# Altium PCB PCB1.PcbDoc (part 2 of 2)
Units mm, origin at the board's own origin, x right, y up, seen from the top; angles counter-clockwise.
Board outline 130 x 100 mm, 6 copper layers (Top Layer, GND1, Signal_Power, Signal2, GND2, Bottom Layer), stack 0.963 mm thick; 332 components, 333 nets, 2042 pads, 102 vias.
Unrouted connection lines stored in the file: 903.
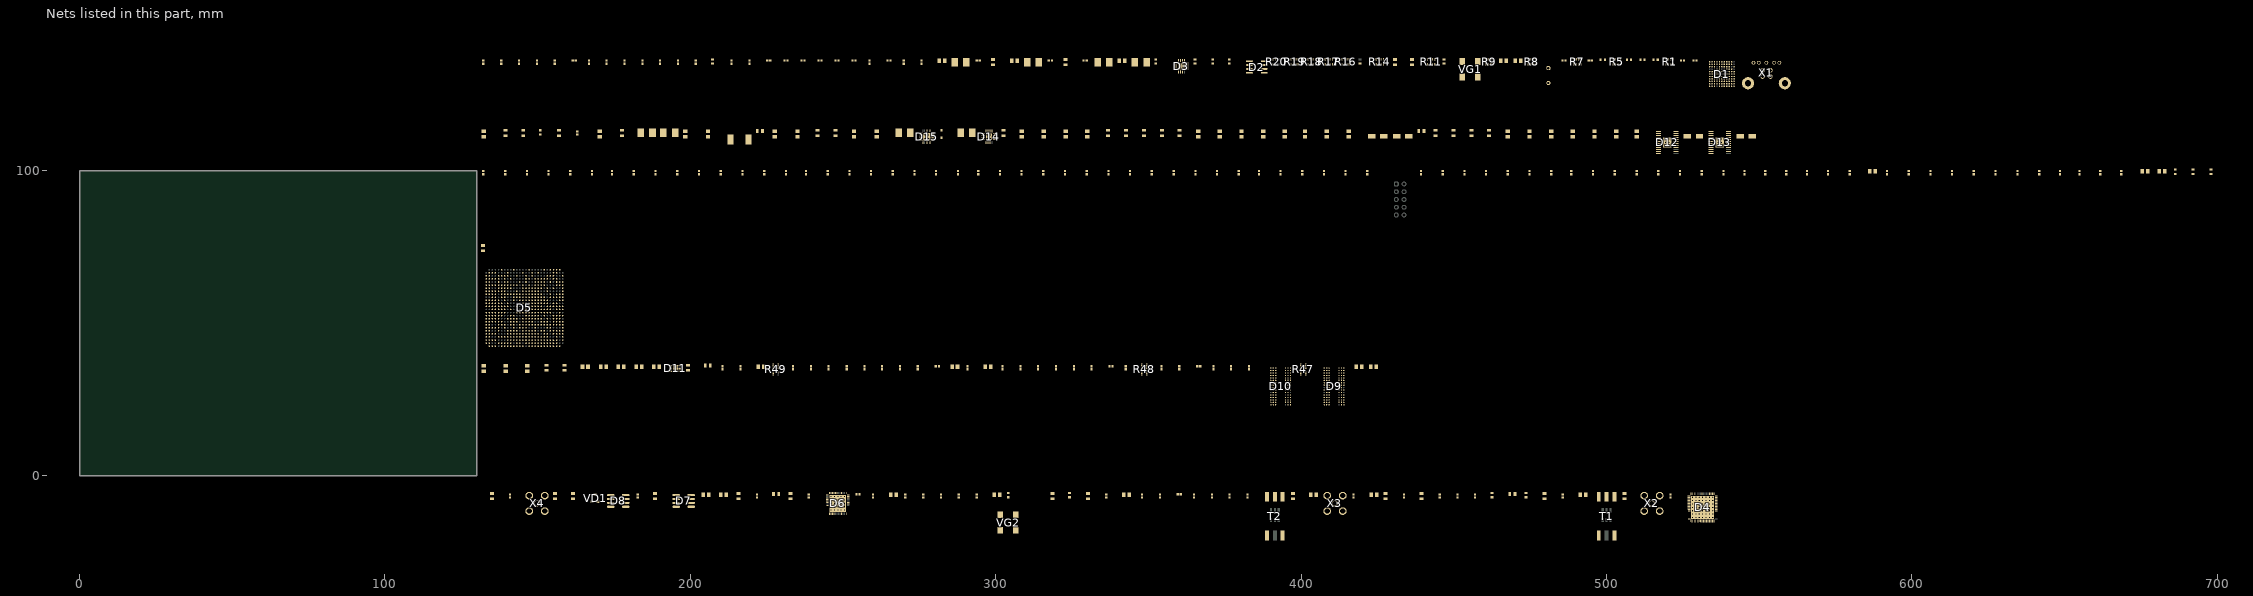
[diagram p4: the nets of this part, all layers, seen from the top]

## Part data
C1 C2 C3 C4 C9 C10 C12 C14 C15 C16 C17 C18 C19 C20 C21 C22 C23 C24 C25 C26 C27 C28 C29 C30 C31 C32 C33 C34 C35 C36 C37 C38 C39 C40 C42 C43 C44 C45 C46 C47 C49 C50 C51 C52 C53 C54 C55 C56 C57 C58 C59 C60 C61 C62 C63 C64 C67 C68 C69 C70 C71 C72 C73 C74 C75 C76 C77 C78 C79 C80 C81 C82 C83 C84 C85 C86 C87 C88 C89 C90 C91 C92 C93 C94 C103 C104 C105 C106 C107 C108 C109 C110 C111 C112 C113 C114 C115 C116 C117 C118 C119 C120 C121 C122 C123 C124 C125 C126 C127 C128 C129 C130 C131 C132 C133 C134 C135 C136 C137 C138 C139 C140 C141 C142 C143 C144 C145 C146 C147 C148 C149 C150 C151 C152 C153 C154 C155 C156 C157 C158 C159 C160 C161 C162 C163 C164 C165 C166 C167 C168 C169 C170 C171 C172 C173 C174 C175 C176 C177 C203: library part CAP_0402, "CAP 1uF 10V ±20% 0402 (1005 Metric) Thickness 0.6mm SMD"
D1: library part CYUSB3014-BZXC
D2: library part AT24C08BN-SP25-T, "8Kbit (1024 x 8), 2-wire Bus Automotive Serial EEPROM with Write Protect, 2.5V, 8-Pin SOIC, Tape & Reel"
D4: "Dual 14-Bit Analog-to-Digital Converter with Parallel Interface, 1.8 V, 125MSPS, -40 to +85 degC, CP-64-6, Pb-Free, Tray"
D5: "Cyclone V E Family FPGA, 1.07 to 1.13 V Supply, 336 I/O Pins, 7 PLLs, 672-Pin FBGA, Speed Grade 8, Commercial Grade, RoHS Compliant"
D6: "12-Output Clock Generator with Integrated 2.5 GHz VCO, 1800 MHz Max f-out, CP-48-8, Pb-Free, 260 Tray"
D9 D10: "2Gb DDR3-1333 SDRAM, 128Mb x 16, 1.5ns, 1.5V, 0 to 95 degC, 96-Ball FBGA, Pb-Free"
D11: "Single Output LDO, 3 A, 2.375 to 3.5 V Input, with DDR Termination, 10-pin SON (DRC), -40 to 85 degC, Green (RoHS & no Sb/Br)"
D12 D13: "Dual 4 MHz, 3 A Synchronous Step-Down DC/DC Converter, 24-pin SOP (FE-24-EPV-AA), -40 to 125 degC, Pb-Free"
D15: "5 A Synchronous Step-Down Regulator, 24-pin QFN (UF-24), -40 to 125 degC, Pb-Free"
L16 L17 L18 L19 L20: "INDUCT"
R2 R3 R4 R6 R10 R15 R21 R22 R23 R24 R27 R30 R32 R37 R39 R55 R56 R57 R74: library part RES_0603, "1K 0.1W 5% 0603 (1608 Metric)  SMD"
R12 R13 R25 R26 R28 R29 R31 R33 R34 R35 R36 R38 R40 R41 R42 R43 R44 R45 R46 R50 R51 R52 R53 R54 R58 R59 R60 R61 R62 R63 R64 R65 R66 R67 R68 R69 R70 R71 R72 R73 R75 R76: library part RES_0805, "1K 0.125W 1% 0805 (2012 Metric)  SMD"
R47 R48 R49: library part cay16-j8
T1 T2: library part TT1-6-KK81
VD1: "SOT23 Silicon Planar High-Speed Switching Series Diode Pair"
VD2: library part "Diode Schottky", "Schottky Diode"

## Via types
v1: diameter 0.5, hole 0.2, Top Layer to Bottom Layer, 102 vias

## Nets (pads, with @x,y where several pads share a name; then routed paths per layer and width w, separated by ;. In a path a pad name is that pad's centre, name@x,y a point inside that pad or via, vN(x,y) a via of type N, cw(c..) or ccw(c..) an arc to the next point about the centre after c; other vN are vias at no path point)
0V: C1.2 C2.2 C5.1 C6.1 C7.2 C8.2 C9.1 C10.1 C11.2 C12.1 C13.2 C14.1 C15.1 C16.1 C17.1 C18.1 C19.1 C20.1 C21.1 C22.1 C23.1 C24.1 C25.1 C26.1 C27.1 C28.1 C29.1 C30.1 C31.1 C32.1 C33.1 C34.1 C35.1 C36.1 C37.1 C38.1 C40.2 C47.2 C56.1 C57.1 C58.1 C59.1 C60.1 C61.1 C62.1 C63.1 C64.1 C65.1 C66.1 C67.2 C69.2 C70.1 C71.1 C72.1 C73.1 C74.2 C75.1 C76.1 C77.1 C78.1 C79.1 C80.1 C81.1 C82.1 C83.2 C84.1 C85.1 C86.1 C87.1 C88.1 C89.1 C90.1 C91.1 C92.2 C93.1 C94.1 C95.1 C96.1 C97.1 C98.1 C99.1 C100.1 C101.1 C102.1 C103.1 C104.1 C105.1 C106.1 C107.1 C108.1 C109.1 C110.1 C111.1 C112.1 C113.1 C114.1 C115.1 C116.1 C117.1 C118.1 C119.1 C120.1 C121.1 C122.1 C123.1 C124.1 C125.1 C126.1 C127.1 C128.1 C129.1 C130.1 C131.1 C132.1 C133.1 C134.1 C135.1 C136.1 C137.1 C138.1 C139.1 C140.1 C141.1 C142.1 C143.1 C144.1 C145.1 C146.1 C147.1 C148.1 C149.1 C150.1 C151.1 C152.1 C153.1 C154.1 C155.1 C156.1 C157.1 C158.1 C159.1 C160.1 C161.1 C162.1 C163.1 C164.1 C165.1 C166.1 C167.1 C168.1 C169.1 C170.1 C171.1 C172.1 C173.1 C174.1 C175.1 C176.1 C177.1 C178.1 C179.1 C180.1 C181.1 C182.1 C183.1 C184.1 C185.1 C186.1 C187.1 C188.1 C189.1 C190.1 C191.1 C192.1 C193.1 C194.1 C195.1 C196.1 C197.2 C198.1 C199.2 C200.1 C202.1 C203.1 C204.2 C205.2 C206.2 C207.1 C208.1 C209.2 D1.A1 D1.A8 D1.B7 D1.B8 D1.B9 D1.D8 D1.E2 D1.G1 D1.G11 D1.K3 D1.K4 D1.L1 D1.L2 D1.L3 D1.L6 D1.L11 D2.1 D2.2 D2.3 D2.4 D2.7 D3.6 D3.17 D5.A15 D5.A25 D5.AA1 D5.AA2 D5.AA5 D5.AA15 D5.AA25 D5.AB1 D5.AB2 D5.AB3 D5.AB4 D5.AB8 D5.AB18 D5.AC1 D5.AC2 D5.AC5 D5.AC7 D5.AC11 D5.AC12 D5.AC13 D5.AC19 D5.AC21 D5.AC26 D5.AD1 D5.AD2 D5.AD3 D5.AD4 D5.AD14 D5.AD15 D5.AD18 D5.AD20 D5.AD22 D5.AD24 D5.AD26 D5.AE1 D5.AE2 D5.AE5 D5.AE7 D5.AE17 D5.AE23 D5.AF2 D5.AF3 D5.AF4 D5.AF10 D5.AF20 D5.AF22 D5.AF24 D5.AF25 D5.B2 D5.B3 D5.B4 D5.B8 D5.B16 D5.B18 D5.C1 D5.C2 D5.C5 D5.C8 D5.C11 D5.C21 D5.D1 D5.D2 D5.D3 D5.D4 D5.D5 D5.D14 D5.D23 D5.D24 D5.E1 D5.E2 D5.E5 D5.E7 D5.E17 D5.F1 D5.F2 D5.F3 D5.F4 D5.F10 D5.F20 D5.G1 D5.G2 D5.G5 D5.G13 D5.G23 D5.H1 D5.H2 D5.H3 D5.H4 D5.H5 D5.H6 D5.H16 D5.H26 D5.J1 D5.J2 D5.J4 D5.J9 D5.J14 D5.J18 D5.K3 D5.K12 D5.K13 D5.K15 D5.K17 D5.K19 D5.K22 D5.L1 D5.L2 D5.L4 D5.L5 D5.L10 D5.L14 D5.L16 D5.L18 D5.L20 D5.L25 D5.L26 D5.M1 D5.M2 D5.M3 D5.M5 D5.M6 D5.M8 D5.M13 D5.M15 D5.M17 D5.M19 D5.N1 D5.N2 D5.N4 D5.N6 D5.N7 D5.N11 D5.N14 D5.N16 D5.N18 D5.N21 D5.P3 D5.P5 D5.P6 D5.P7 D5.P9 D5.P13 D5.P15 D5.P17 D5.P19 D5.P24 D5.P25 D5.R1 D5.R2 D5.R4 D5.R7 D5.R12 D5.R14 D5.R16 D5.R18 D5.T1 D5.T2 D5.T3 D5.T5 D5.T10 D5.T15 D5.T17 D5.T20 D5.U1 D5.U2 D5.U4 D5.U9 D5.U13 D5.U15 D5.U16 D5.U17 D5.U23 D5.V1 D5.V2 D5.V3 D5.V4 D5.V5 D5.V6 D5.V9 D5.V16 D5.V19 D5.V26 D5.W1 D5.W2 D5.W5 D5.W6 D5.W9 D5.W18 D5.W19 D5.W23 D5.Y1 D5.Y2 D5.Y3 D5.Y4 D5.Y12 D5.Y22 D6.49 D7.5 D8.5 D9.A9 D9.B1 D9.B3 D9.B9 D9.D1 D9.D8 D9.E1 D9.E2 D9.E8 D9.F9 D9.G1 D9.G8 D9.G9 D9.J2 D9.J8 D9.M1 D9.M9 D9.P1 D9.P9 D9.T1 D9.T9 D10.A9 D10.B1 D10.B3 D10.B9 D10.D1 D10.D8 D10.E1 D10.E2 D10.E8 D10.F9 D10.G1 D10.G8 D10.G9 D10.J2 D10.J8 D10.M1 D10.M9 D10.P1 D10.P9 D10.T1 D10.T9 D11.4 D11.8 D11.11 D12.1 D12.5 D12.14 D12.24 D12.25 D13.5 D13.14 D13.25 D14.6 D14.17 D15.10 D15.22 D15.25 R2.1 R3.2 R4.1 R12.2 R13.2 R23.2 R26.1 R40.2 R41.2 R46.1 R50.2 R51.2 R53.1 R54.2 R55.1 R56.1 R57.2 R61.2 R62.2 R65.2 R68.1 R71.1 R73.2 R76.1 VD1.3 VG1.2 VG2.2 X1.4 X1.7 X1.10 X4.2
  other v1: 246.1,-11.2 247.2,-11.2 248.3,-11.2 249.4,-11.2 250.5,-11.2 246.1,-10.1 247.2,-10.1 248.3,-10.1 249.4,-10.1 250.5,-10.1 246.1,-9 247.2,-9 248.3,-9 249.4,-9 250.5,-9 246.1,-7.9 247.2,-7.9 248.3,-7.9 249.4,-7.9 250.5,-7.9 246.1,-6.8 247.2,-6.8 248.3,-6.8 249.4,-6.8 250.5,-6.8 194.6,34.7 195.6,34.7 194.6,35.7 195.6,35.7 519.349,108.1 520.449,108.1 536.549,108.1 537.649,108.1 519.349,109.2 520.449,109.2 536.549,109.2 537.649,109.2 519.349,110.3 520.449,110.3 536.549,110.3 537.649,110.3 276.949,110.55 278.049,110.55 297.249,110.55 298.349,110.55 276.949,111.65 278.049,111.65 297.249,111.65 298.349,111.65 360.249,133.65 361.349,133.65 360.249,134.75 361.349,134.75
0VA: C42.2 C43.2 R29.1 R30.1 R34.2 R36.1 R37.1 T1.6 T2.6 X2.2 X3.2
12V: C198.2 C199.1 D15.7 D15.17 D15.18 R70.1
AD97_CS: D5.J7 D6.14
AD9517_EXT_CLK: C68.2 D6.47 R44.1 R46.2 VD1.1
AD9517_FPGA_CLK: D5.F6 D6.48 VG2.3
AD9517_REF_SEL: D5.C7 D6.6
AD9517_REFMON: D5.D7 D6.1
AD9517_SCLK: D5.H7 D6.13
AD9517_SDIO: D5.L7 D6.16
AD9517_SDO: D5.K6 D6.15
AD9517_STATUS: D5.G6 D6.5
ADC_CLK_N: C45.1 D6.34 R33.1
ADC_CLK_P: C44.1 D6.35 R33.2
ADC_CML: C40.1 C47.1 D4.41 T1.2 T2.2
ADC_CSB: D4.51 D5.A23
ADC_D0_N: D4.62 D5.J16
ADC_D0_P: D4.63 D5.H15
ADC_D1_N: D4.2 D5.A24
ADC_D1_P: D4.3 D5.B24
ADC_D2_N: D4.4 D5.H17
ADC_D2_P: D4.5 D5.H18
ADC_D3_N: D4.6 D5.D20
ADC_D3_P: D4.7 D5.D21
ADC_D4_N: D4.8 D5.G17
ADC_D4_P: D4.9 D5.G16
ADC_D5_N: D4.12 D5.E19
ADC_D5_P: D4.13 D5.E20
ADC_D6_N: D4.14 D5.J11
ADC_D6_P: D4.15 D5.J12
ADC_D7_N: D4.16 D5.D17
ADC_D7_P: D4.17 D5.D18
ADC_D8_N: D4.18 D5.H13
ADC_D8_P: D4.19 D5.H14
ADC_D9_N: D4.22 D5.F18
ADC_D9_P: D4.23 D5.E18
ADC_D10_N: D4.25 D5.K11
ADC_D10_P: D4.26 D5.L12
ADC_D11_N: D4.27 D5.D15
ADC_D11_P: D4.28 D5.C14
ADC_D12_N: D4.29
ADC_D12_P: D4.30
ADC_D13_N: D4.31
ADC_D13_P: D4.32
ADC_DCO_N: D4.10 D5.G14
ADC_DCO_P: D4.11 D5.G15
ADC_SCLK: D4.48 D5.C23
ADC_SDIO: D4.47 D5.C22
ADC_SYNC: D4.52 D5.A22
AVDD: C13.1 C25.2 D1.A7 L3.2
CY_CLK: C6.2 D1.C6 VG1.3 ZQ1.2
CY_CTRL0: D5.U24 R16.2
CY_CTRL1: D5.V25 R16.4
CY_CTRL2: D5.R20 R17.2
CY_CTRL3: D5.P20 R17.4
CY_CTRL4: D5.AB26 R18.2
CY_CTRL5: D5.AA26 R18.3
CY_CTRL6: D5.T26 R18.4
CY_CTRL7: D5.V23 R19.1
CY_CTRL8: D5.V24 R19.2
CY_CTRL9: D5.T23 R19.3
CY_CTRL10: D5.T24 R19.4
CY_CTRL11: D5.AA24 R20.1
CY_CTRL12: D5.AB25 R20.2
CY_DQ0: D5.U19 R1.2
CY_DQ1: D5.V20 R1.4
CY_DQ2: D5.AA22 R5.2
CY_DQ3: D5.AA23 R5.4
CY_DQ4: D5.W20 R7.2
CY_DQ5: D5.W21 R7.4
CY_DQ6: D5.AC24 R8.2
CY_DQ7: D5.AB24 R8.4
CY_DQ8: D5.Y26 R9.2
CY_DQ9: D5.P21 R9.4
CY_DQ10: D5.P22 R11.2
CY_DQ11: D5.W25 R11.4
CY_DQ12: D5.W26 R14.1
CY_DQ13: D5.N25 R14.2
CY_DQ14: D5.P26 R14.3
CY_DQ15: D5.U25 R14.4
CY_DQ16: D5.M21 R1.1
CY_DQ17: D5.J25 R1.3
CY_DQ18: D5.J26 R5.1
CY_DQ19: D5.N24 R5.3
CY_DQ20: D5.M24 R7.1
CY_DQ21: D5.F26 R7.3
CY_DQ22: D5.G26 R8.1
CY_DQ23: D5.N23 R8.3
CY_DQ24: D5.E26 R9.1
CY_DQ25: D5.K25 R9.3
CY_DQ26: D5.K26 R11.1
CY_DQ27: D5.E24 R11.3
CY_DQ28: D5.E25 R16.3
CY_DQ29: D5.K24 R17.1
CY_DQ30: D5.K23 R17.3
CY_DQ31: D5.F24 R18.1
CY_PCLK: D5.R25 R16.1
CY_SCL: D1.D9 D2.6 R21.1
CY_SDA: D1.D10 D2.5 R22.1
CY_SPI_MISO: D1.C2
CY_SPI_MOSI: D1.D5
CY_SPI_SCK: D1.D4 D5.N8
CY_SPI_SSN: D1.C1
DDR_A0: D5.AE6 D9.N3 D10.N3 R47.2
DDR_A1: D5.AF6 D9.P7 D10.P7 R47.4
DDR_A2: D5.AF7 D9.P3 D10.P3 R47.6
DDR_A3: D5.AF8 D9.N2 D10.N2 R47.8
DDR_A4: D5.U10 D9.P8 D10.P8 R47.10
DDR_A5: D5.U11 D9.P2 D10.P2 R47.12
DDR_A6: D5.AE9 D9.R8 D10.R8 R47.14
DDR_A7: D5.AF9 D9.R2 D10.R2 R47.16
DDR_A8: D5.AB12 D9.T8 D10.T8 R48.2
DDR_A9: D5.AB11 D9.R3 D10.R3 R48.4
DDR_A10: D5.AC9 D9.L7 D10.L7 R48.6
DDR_A11: D5.AC8 D9.R7 D10.R7 R48.8
DDR_A12: D5.AB10 D9.N7 D10.N7 R48.10
DDR_A13: D5.AC10 D9.T3 D10.T3 R48.12
DDR_BA0: D5.V10 D10.M2 R48.14
DDR_BA1: D5.AD8 D9.M2 D10.N8 R48.16
DDR_BA2: D5.AE8 D9.N8 D10.M3 R49.2
DDR_BA3: D9.M3
DDR_CAS: D5.W10 D9.K3 D10.K3 R49.6
DDR_CK_N: D9.K7 D10.K7
DDR_CK_P: D9.J7 D10.J7
DDR_CKE: D9.K9 D10.K9
DDR_CS: D5.R11 D9.L2 D10.L2 R49.10
DDR_DM0: D5.AF11 D10.E7
DDR_DM1: D5.AE18 D10.D3
DDR_DM2: D5.AE20 D9.E7
DDR_DM3: D5.AE24 D9.D3
DDR_DQ0: D5.AA14 D10.E3
DDR_DQ1: D5.Y14 D10.F7
DDR_DQ2: D5.AD11 D10.F2
DDR_DQ3: D5.AD12 D10.F8
DDR_DQ4: D5.Y13 D10.H3
DDR_DQ5: D5.W12 D10.H8
DDR_DQ6: D5.AD10 D10.G2
DDR_DQ7: D5.AF12 D10.H7
DDR_DQ8: D5.AC15 D10.D7
DDR_DQ9: D5.AB15 D10.C3
DDR_DQ10: D5.AC14 D10.C8
DDR_DQ11: D5.AF13 D10.C2
DDR_DQ12: D5.AB16 D10.A7
DDR_DQ13: D5.AA16 D10.A2
DDR_DQ14: D5.AE14 D10.B8
DDR_DQ15: D5.AF18 D10.A3
DDR_DQ16: D5.AD16 D9.E3
DDR_DQ17: D5.AD17 D9.F7
DDR_DQ18: D5.AC18 D9.F2
DDR_DQ19: D5.AF19 D9.F8
DDR_DQ20: D5.AC17 D9.H3
DDR_DQ21: D5.AB17 D9.H8
DDR_DQ22: D5.AF21 D9.G2
DDR_DQ23: D5.AE21 D9.H7
DDR_DQ24: D5.AE15 D9.D7
DDR_DQ25: D5.AE16 D9.C3
DDR_DQ26: D5.AC20 D9.C8
DDR_DQ27: D5.AD21 D9.C2
DDR_DQ28: D5.AF16 D9.A7
DDR_DQ29: D5.AF17 D9.A2
DDR_DQ30: D5.AD23 D9.B8
DDR_DQ31: D5.AF23 D9.A3
DDR_DQS0_N: D5.W13 D10.G3
DDR_DQS0_P: D5.V13 D10.F3
DDR_DQS1_N: D5.V14 D10.B7
DDR_DQS1_P: D5.U14 D10.C7
DDR_DQS2_N: D5.W15 D9.G3
DDR_DQS2_P: D5.V15 D9.F3
DDR_DQS3_N: D5.W17 D9.B7
DDR_DQS3_P: D5.W16 D9.C7
DDR_ODT: D5.AD13 D9.K1 D10.K1 R49.12
DDR_RAS: D5.Y10 D9.J3 D10.J3 R49.8
DDR_RESET_N: D5.AE19 D9.T2 D10.T2
DDR_WE: D5.T9 D9.L3 D10.L3 R49.4
DIR485: D5.J10 D7.2 D7.3 D8.2 D8.3
FPGA_CONF_DONE: D5.A6
FPGA_NCONFIG: D5.F5
NetC1_1: C1.1 C2.1 D1.E11 X1.1
NetC3_2: C3.2 D1.A5
NetC4_2: C4.2 D1.A6
NetC5_2: C5.2 D1.C7 ZQ1.1
NetC9_2: C9.2 D1.C5 R24.1
NetC24_2: C24.2 D3.7
NetC39_1: C39.1 X2.1
NetC39_2: C39.2 R29.2 T1.4
NetC41_1: C41.1 D4.38 R31.1
NetC41_2: C41.2 D4.37 R28.1
NetC42_1: C42.1 C43.1 D4.39 R32.2
NetC44_2: C44.2 D4.49
NetC45_2: C45.2 D4.50
NetC46_1: C46.1 X3.1
NetC46_2: C46.2 R36.2 T2.4
NetC48_1: C48.1 D4.43 R38.1
NetC48_2: C48.2 D4.44 R35.1
NetC49_1: C49.1 C50.1 C51.1 C52.1 C53.1 C54.1 C55.1 D4.20 D4.64 D4.65 R37.2
  other v1: 528.2,-13.6 529.3,-13.6 530.4,-13.6 531.5,-13.6 532.6,-13.6 533.7,-13.6 534.8,-13.6 528.2,-12.5 529.3,-12.5 530.4,-12.5 531.5,-12.5 532.6,-12.5 533.7,-12.5 534.8,-12.5 528.2,-11.4 529.3,-11.4 530.4,-11.4 531.5,-11.4 532.6,-11.4 533.7,-11.4 534.8,-11.4 528.2,-10.3 529.3,-10.3 530.4,-10.3 531.5,-10.3 532.6,-10.3 533.7,-10.3 534.8,-10.3 528.2,-9.2 529.3,-9.2 530.4,-9.2 531.5,-9.2 532.6,-9.2 533.7,-9.2 534.8,-9.2 528.2,-8.1 529.3,-8.1 530.4,-8.1 531.5,-8.1 532.6,-8.1 533.7,-8.1 534.8,-8.1 528.2,-7 529.3,-7 530.4,-7 531.5,-7 532.6,-7 533.7,-7 534.8,-7
NetC53_2: C53.2 C54.2 C55.2 D4.36 D4.45 D4.46 L4.1
NetC56_2: C56.2 C57.2 C58.2 C59.2 C60.2 D6.10 D6.21 D6.24 D6.25 D6.30 D6.31 D6.36 D6.37 D6.40 D6.43 D6.45 L6.1 L7.2
NetC61_2: C61.2 C62.2 D6.3 L7.1
NetC63_2: C63.2 D6.12
NetC64_2: C64.2 D6.9
NetC65_2: C65.2 D6.4 D6.8 R42.1
NetC66_2: C66.2 R42.2
NetC68_1: C68.1 X4.1
NetC69_1: C69.1 C74.1 C83.1 C92.1 C93.2 C94.2 L12.1 R47.1 R47.3 R47.5 R47.7 R47.9 R47.11 R47.13 R47.15 R48.1 R48.3 R48.5 R48.7 R48.9 R48.11 R48.13 R48.15 R49.1 R49.3 R49.5 R49.7 R49.9 R49.11 R49.13 R49.15
NetC70_2: C70.2 C71.2 D9.H1 D9.M8 L8.2
NetC72_2: C72.2 C73.2 D10.H1 D10.M8 L9.2
NetC75_2: C75.2 C76.2 C77.2 C78.2 D9.A1 D9.A8 D9.C1 D9.C9 D9.D2 D9.E9 D9.F1 D9.H2 D9.H9 L10.2
NetC79_2: C79.2 C80.2 C81.2 C82.2 D10.A1 D10.A8 D10.C1 D10.C9 D10.D2 D10.E9 D10.F1 D10.H2 D10.H9 L11.2
NetC99_2: C99.2 D11.6
NetC100_2: C100.2 D11.1 R52.1 R53.2
NetC110_2: C110.2 C111.2 C112.2 C113.2 C114.2 D5.G21 D5.J6 D5.L3 D5.R3 D5.T4 D5.W7 D5.Y21 L13.1 L14.1
NetC122_2: C122.2 C123.2 C124.2 C125.2 C126.2 D5.AA8 D5.AB14 D5.AB20 D5.E14 D5.G9 D5.G19 L15.1
NetC185_2: C185.2 R60.1
NetC186_2: C186.2 D12.22 R60.2
NetC193_2: C193.2 R66.1
NetC194_2: C194.2 D13.3 D13.22 R66.2
NetC195_2: C195.2 R64.1
NetC196_2: C196.2 D12.3 R64.2
NetC200_2: C200.2 D15.2 D15.3 D15.21 VD2.A
NetC201_1: C201.1 D15.11 D15.12 D15.13 D15.14 D15.15 D15.16 L20.1
NetC201_2: C201.2 D15.20 VD2.K
NetC202_2: C202.2 D15.19 R70.2
NetC203_2: C203.2 D14.7
NetC204_1: C204.1 D15.5
NetC209_1: C209.1 R75.1
NetD1_B2: D1.B2 R2.2
NetD1_B3: D1.B3 R13.1
NetD1_B4: D1.B4 R4.2
NetD1_C8: D1.C8 R12.1
NetD1_C9: D1.C9 R3.1
NetD1_E1: D1.E1 R17.8
NetD1_E4: D1.E4 R18.8
NetD1_E5: D1.E5 R17.6
NetD1_E6: D1.E6 R6.2
NetD1_F2: D1.F2 R15.1
NetD1_F3: D1.F3 R11.6
NetD1_F4: D1.F4 R9.8
NetD1_F5: D1.F5 R16.6
NetD1_F7: D1.F7 R5.7
NetD1_F8: D1.F8 R7.5
NetD1_F9: D1.F9 R1.5
NetD1_F10: D1.F10 R1.7
NetD1_G2: D1.G2 R9.6
NetD1_G3: D1.G3 R11.8
NetD1_G5: D1.G5 R19.7
NetD1_G6: D1.G6 R18.6
NetD1_G7: D1.G7 R18.7
NetD1_G8: D1.G8 R14.5
NetD1_G9: D1.G9 R7.7
NetD1_G10: D1.G10 R5.5
NetD1_H2: D1.H2 R8.8
NetD1_H3: D1.H3 R8.6
NetD1_H5: D1.H5 R20.7
NetD1_H6: D1.H6 R19.6
NetD1_H7: D1.H7 R17.5
NetD1_H8: D1.H8 R19.8
NetD1_H9: D1.H9 R8.5
NetD1_H10: D1.H10 R8.7
NetD1_J1: D1.J1 R7.6
NetD1_J2: D1.J2 R5.6
NetD1_J3: D1.J3 R7.8
NetD1_J4: D1.J4 R1.6
NetD1_J5: D1.J5 R20.8
NetD1_J6: D1.J6 R16.8
NetD1_J7: D1.J7 R17.7
NetD1_J8: D1.J8 R14.6
NetD1_J9: D1.J9 R9.5
NetD1_J10: D1.J10 R9.7
NetD1_K1: D1.K1 R5.8
NetD1_K2: D1.K2 R1.8
NetD1_K5: D1.K5 R19.5
NetD1_K6: D1.K6 R18.5
NetD1_K7: D1.K7 R16.5
NetD1_K8: D1.K8 R16.7
NetD1_K9: D1.K9 R14.7
NetD1_K10: D1.K10 R14.8
NetD1_K11: D1.K11 R11.7
NetD1_L8: D1.L8 R23.1
NetD1_L10: D1.L10 R11.5
NetD3_5: D3.5 R27.1
NetD3_9: D3.9 R25.1 R26.2
NetD4_40: D4.40 R30.2 R32.1
NetD4_42: D4.42 R34.1
NetD5_AE11: D5.AE11 R54.1
NetD5_R6: D5.R6 R55.2
NetD5_T6: D5.T6 R57.1
NetD5_Y5: D5.Y5 R56.2
NetD6_44: D6.44 R40.1
NetD6_46: D6.46 R41.1
NetD7_6: D7.6 R43.2
NetD7_7: D7.7 R43.1
NetD8_6: D8.6 R45.2
NetD8_7: D8.7 R45.1
NetD9_L8: D9.L8 R51.1
NetD10_L8: D10.L8 R50.1
NetD12_2: D12.2 R63.1 R65.1
NetD12_8: D12.8 D12.9 L18.1
NetD12_16: D12.16 D12.17 L16.1
NetD12_23: D12.23 R58.1 R61.1
NetD13_2: D13.2 D13.23 R59.1 R62.1
NetD13_8: D13.8 D13.9 L19.1
NetD13_16: D13.16 D13.17 L17.1
NetD13_24: D13.24 R67.2 R68.2
NetD14_5: D14.5 R74.1
NetD14_9: D14.9 R69.1 R71.2
NetD15_1: D15.1 R76.2
NetD15_4: D15.4 R72.1 R73.1
NetD15_6: D15.6 R75.2
NetR10_2: R10.2 VG1.1
NetR28_2: R28.2 T1.3
NetR31_2: R31.2 T1.1
NetR35_2: R35.2 T2.3
NetR38_2: R38.2 T2.1
NetR39_2: R39.2 VG2.1
RX485_0: D5.J8 D7.1
RX485_1: D5.G7 D8.1
SS_RX_N: D1.A3 X1.8
SS_RX_P: D1.A4 X1.9
SS_TX_N: C4.1 X1.5
SS_TX_P: C3.1 X1.6
TX485_0: D5.F7 D7.4
TX485_1: D5.K10 D8.4
U3RXVDDQ: C8.1 C10.2 D1.A2 L1.2
U3TXVDDQ: C11.1 C12.2 D1.B5 L2.2
USB_N: D1.A10 X1.2
USB_P: D1.A9 X1.3
V0P75D: C96.2 C97.2 C98.2 D11.3 D11.5 L8.1 L9.1 L12.2
V1P1D: C103.2 C104.2 C105.2 C106.2 C107.2 C108.2 C109.2 C115.2 C116.2 C117.2 C118.2 C119.2 C120.2 C121.2 C127.2 C128.2 C129.2 C130.2 C131.2 C132.2 C133.2 C183.2 C184.2 D5.J3 D5.J13 D5.J15 D5.J17 D5.J19 D5.K4 D5.K14 D5.K16 D5.K18 D5.K20 D5.L13 D5.L15 D5.L17 D5.L19 D5.M4 D5.M14 D5.M16 D5.M18 D5.M20 D5.N3 D5.N5 D5.N13 D5.N15 D5.N17 D5.N19 D5.P4 D5.P14 D5.P16 D5.P18 D5.R5 D5.R13 D5.R15 D5.R17 D5.R19 D5.T14 D5.T16 D5.T18 D5.U3 D5.U5 L17.2 L19.2 R59.2
V1P2D: C7.1 C14.2 C15.2 C16.2 C17.2 C18.2 C19.2 C20.2 C21.2 C22.2 C23.2 D1.B10 D1.C3 D1.E9 D1.F11 D1.H1 D1.J11 D1.L5 D1.L7 D3.10 D3.11 D3.12 D3.13 D3.14 L1.1 L2.1 L3.1 R25.2
V1P5D: C84.2 C85.2 C86.2 C87.2 C88.2 C89.2 C90.2 C91.2 C101.2 C102.2 C148.2 C149.2 C150.2 C151.2 C152.2 C153.2 C154.2 C155.2 C156.2 C197.1 D5.AA10 D5.AA20 D5.AB13 D5.AC6 D5.AC16 D5.AD9 D5.AD19 D5.AE12 D5.AE22 D5.AF15 D5.E8 D5.U8 D5.U18 D5.V11 D5.W14 D5.Y7 D5.Y17 D9.B2 D9.D9 D9.G7 D9.K2 D9.K8 D9.N1 D9.N9 D9.R1 D9.R9 D10.B2 D10.D9 D10.G7 D10.K2 D10.K8 D10.N1 D10.N9 D10.R1 D10.R9 D11.2 D11.7 D14.10 D14.11 D14.12 D14.13 D14.14 L10.1 L11.1 R52.2 R69.2
V1P8D: C26.2 C27.2 C28.2 C29.2 C30.2 C31.2 C32.2 C49.2 C50.2 C51.2 C52.2 C157.2 C158.2 C166.2 C167.2 C168.2 C169.2 C174.2 C175.2 C176.2 C177.2 C179.2 C180.2 D1.E3 D1.F1 D1.G4 D1.H4 D1.H11 D1.L9 D3.1 D3.2 D3.3 D3.4 D3.15 D3.16 D4.1 D4.21 D4.24 D4.57 D5.AB23 D5.C26 D5.E22 D5.F25 D5.H21 D5.J24 D5.M23 D5.N26 D5.R22 D5.T25 D5.V21 D5.W24 D14.1 D14.2 D14.3 D14.4 D14.15 D14.16 L4.2 L5.1 L5.2 L16.2 R24.2 R27.2 R58.2 R74.2
V2P5D: C134.2 C135.2 C136.2 C137.2 C138.2 C139.2 C140.2 C141.2 C142.2 C143.2 C144.2 C145.2 C146.2 C147.2 C159.2 C160.2 C161.2 C162.2 C163.2 C164.2 C165.2 C189.2 C190.2 D5.A10 D5.A20 D5.AA11 D5.AA13 D5.AA17 D5.AA19 D5.AB9 D5.AB21 D5.B13 D5.B23 D5.C16 D5.D19 D5.E12 D5.F9 D5.F11 D5.F13 D5.F15 D5.F17 D5.F19 D5.G18 D5.H11 D5.J22 D5.L21 D5.N22 D5.R21 D5.U21 L13.2 L14.2 L15.2 L18.2 R63.2
V3P3D: C33.2 C34.2 C35.2 C36.2 C37.2 C38.2 C67.1 C95.2 C170.2 C171.2 C172.2 C173.2 C178.2 C181.2 C182.2 C187.2 C188.2 C191.2 C192.2 C205.1 C206.1 C207.2 C208.2 D1.B1 D1.B6 D1.C11 D1.E10 D2.8 D5.AA9 D5.C6 D5.D9 D5.F8 D5.G8 D5.K7 D5.W22 D7.8 D8.8 D11.10 D12.4 D12.6 D12.7 D12.10 D12.11 D12.12 D12.18 D12.19 D12.20 D12.21 D13.1 D13.4 D13.6 D13.7 D13.10 D13.11 D13.12 D13.18 D13.19 D13.20 D13.21 D15.9 L6.2 L20.2 R6.1 R10.1 R21.2 R22.2 R39.1 R44.2 R67.1 R72.2 VD1.2 VG1.4 VG2.4
pads on no net: D1.A11 D1.B11 D1.C4 D1.C10 D1.D1 D1.D2 D1.D3 D1.D6 D1.D7 D1.D11 D1.E7 D1.E8 D1.F6 D1.L4 D3.8 D4.33 D4.34 D4.35 D4.53 D4.54 D4.55 D4.56 D4.58 D4.59 D4.60 D4.61 D5.A2 D5.A3 D5.A4 D5.A5 D5.A7 D5.A8 D5.A9 D5.A11 D5.A12 D5.A13 D5.A14 D5.A16 D5.A17 D5.A18 D5.A19 D5.A21 D5.AA3 D5.AA4 D5.AA6 D5.AA7 D5.AA12 D5.AA18 D5.AA21 D5.AB5 D5.AB6 D5.AB7 D5.AB19 D5.AB22 D5.AC3 D5.AC4 D5.AC22 D5.AC23 D5.AC25 D5.AD5 D5.AD6 D5.AD7 D5.AD25 D5.AE3 D5.AE4 D5.AE10 D5.AE13 D5.AE25 D5.AE26 D5.AF5 D5.AF14 D5.B1 D5.B5 D5.B6 D5.B7 D5.B9 D5.B10 D5.B11 D5.B12 D5.B14 D5.B15 D5.B17 D5.B19 D5.B20 D5.B21 D5.B22 D5.B25 D5.B26 D5.C3 D5.C4 D5.C9 D5.C10 D5.C12 D5.C13 D5.C15 D5.C17 D5.C18 D5.C19 D5.C20 D5.C24 D5.C25 D5.D6 D5.D8 D5.D10 D5.D11 D5.D12 D5.D13 D5.D16 D5.D22 D5.D25 D5.D26 D5.E3 D5.E4 D5.E6 D5.E9 D5.E10 D5.E11 D5.E13 D5.E15 D5.E16 D5.E21 D5.E23 D5.F12 D5.F14 D5.F16 D5.F21 D5.F22 D5.F23 D5.G3 D5.G4 D5.G10 D5.G11 D5.G12 D5.G20 D5.G22 D5.G24 D5.G25 D5.H8 D5.H9 D5.H10 D5.H12 D5.H19 D5.H20 D5.H22 D5.H23 D5.H24 D5.H25 D5.J5 D5.J20 D5.J21 D5.J23 D5.K1 D5.K2 D5.K5 D5.K8 D5.K9 D5.K21 D5.L6 D5.L8 D5.L9 D5.L11 D5.L22 D5.L23 D5.L24 D5.M7 D5.M9 D5.M10 D5.M11 D5.M12 D5.M22 D5.M25 D5.M26 D5.N9 D5.N10 D5.N12 D5.N20 D5.P1 D5.P2 D5.P8 D5.P10 D5.P11 D5.P12 D5.P23 D5.R8 D5.R9 D5.R10 D5.R23 D5.R24 D5.R26 D5.T7 D5.T8 D5.T11 D5.T12 D5.T13 D5.T19 D5.T21 D5.T22 D5.U6 D5.U7 D5.U12 D5.U20 D5.U22 D5.U26 D5.V7 D5.V8 D5.V12 D5.V17 D5.V18 D5.V22 D5.W3 D5.W4 D5.W8 D5.W11 D5.Y6 D5.Y8 D5.Y9 D5.Y11 D5.Y15 D5.Y16 D5.Y18 D5.Y19 D5.Y20 D5.Y23 D5.Y24 D5.Y25 D6.2 D6.7 D6.11 D6.17 D6.18 D6.19 D6.20 D6.22 D6.23 D6.26 D6.27 D6.28 D6.29 D6.32 D6.33 D6.38 D6.39 D6.41 D6.42 D9.J1 D9.J9 D9.L1 D9.L9 D9.M7 D9.T7 D10.J1 D10.J9 D10.L1 D10.L9 D10.M7 D10.T7 D11.9 D12.13 D12.15 D13.13 D13.15 D14.8 D15.8 D15.23 D15.24 R15.2 R20.3 R20.4 R20.5 R20.6 R49.14 R49.16 T1.5 T1.11 T1.12 T1.13 T1.14 T1.15 T1.16 T2.5 T2.11 T2.12 T2.13 T2.14 T2.15 T2.16 X5.1 X5.2 X5.3 X5.4 X5.5 X5.6 X5.7 X5.8 X5.9 X5.10

## Polygon pours and split planes (outlines as drawn)
0V on GND1 (split plane): 129.498,0.502 43.002,0.502 43.002,73.498 129.498,73.498
0V on GND1 (split plane): 129.498,74.502 42.5,74.502 42.402,74.493 42.308,74.464 42.221,74.418 42.145,74.355 42.082,74.279 42.036,74.192 42.007,74.098 41.998,74 41.998,0.502 0.502,0.502 0.502,99.498 129.498,99.498
0V on GND2 (split plane): 129.498,0.502 43.002,0.502 43.002,73.498 129.498,73.498
0V on GND2 (split plane): 129.498,74.502 42.5,74.502 42.402,74.493 42.308,74.464 42.221,74.418 42.145,74.355 42.082,74.279 42.036,74.192 42.007,74.098 41.998,74 41.998,0.502 0.502,0.502 0.502,99.498 129.498,99.498

## Text inside footprints (layer, text, board x,y; h text height)
C7: Top Overlay "+" at 344.796,132.457 h0.94
C8: Top Overlay "+" at 332.596,132.457 h0.94
C11: Top Overlay "+" at 309.496,132.457 h0.94
C13: Top Overlay "+" at 285.796,132.457 h0.94
C197: Top Overlay "+" at 287.696,109.357 h0.94
C199: Top Overlay "+" at 267.396,109.357 h0.94
C205: Top Overlay "+" at 182.996,109.357 h0.94
C206: Top Overlay "+" at 190.396,109.357 h0.94
X1: Top Overlay "usb_3" at 548.899,119.8 h1.5